# Altium PCB Slave_Relay.PcbDoc
Units mm, origin at the board's own origin, x right, y up, seen from the top; angles counter-clockwise.
Board outline 102.11 x 95 mm, 2 copper layers (Top Layer, Bottom Layer); 44 components, 37 nets, 147 pads, 7 vias.
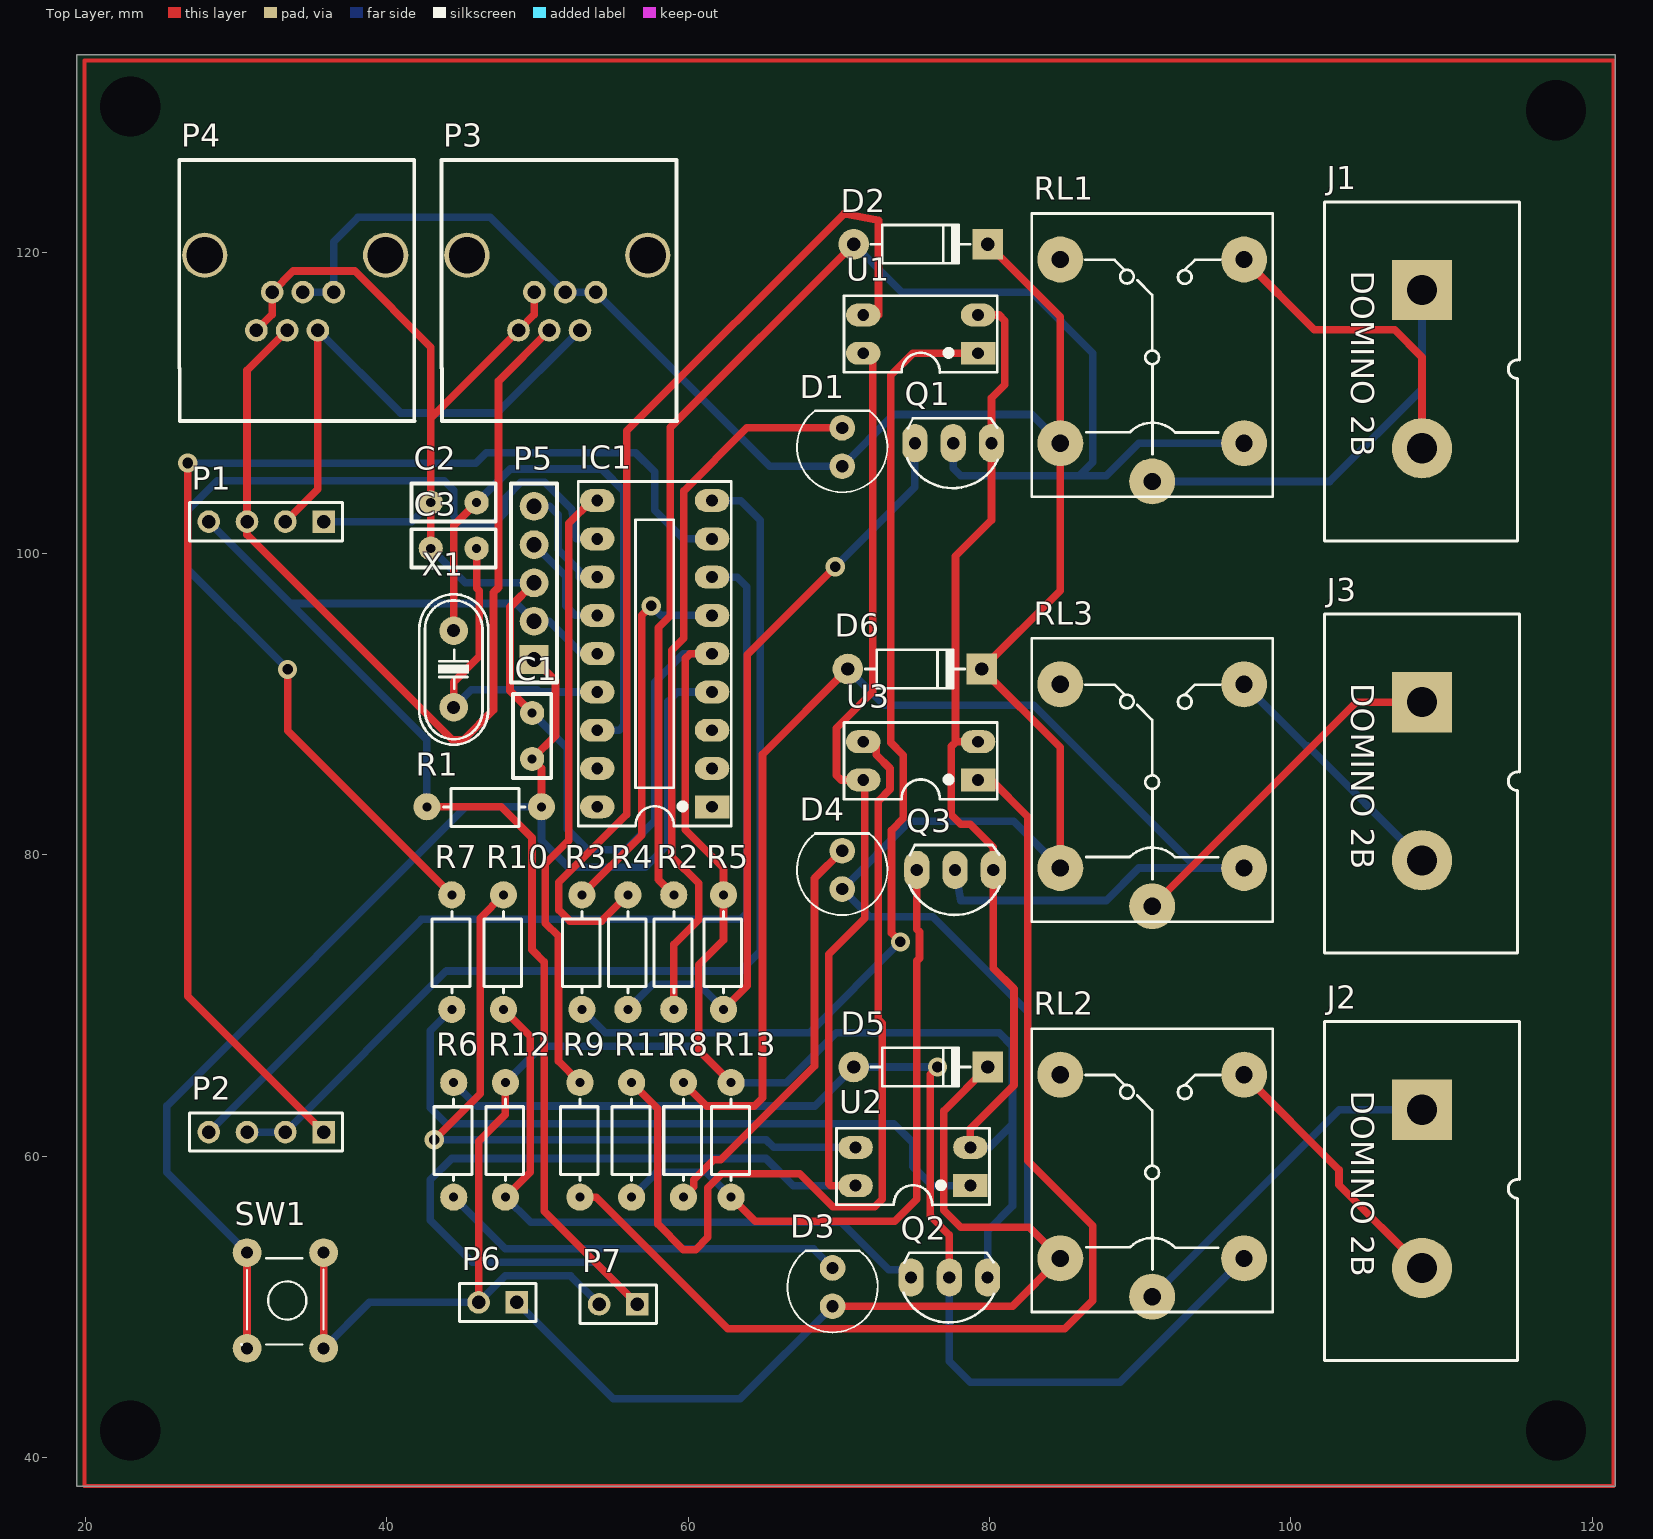
[diagram p0: Top Layer view]
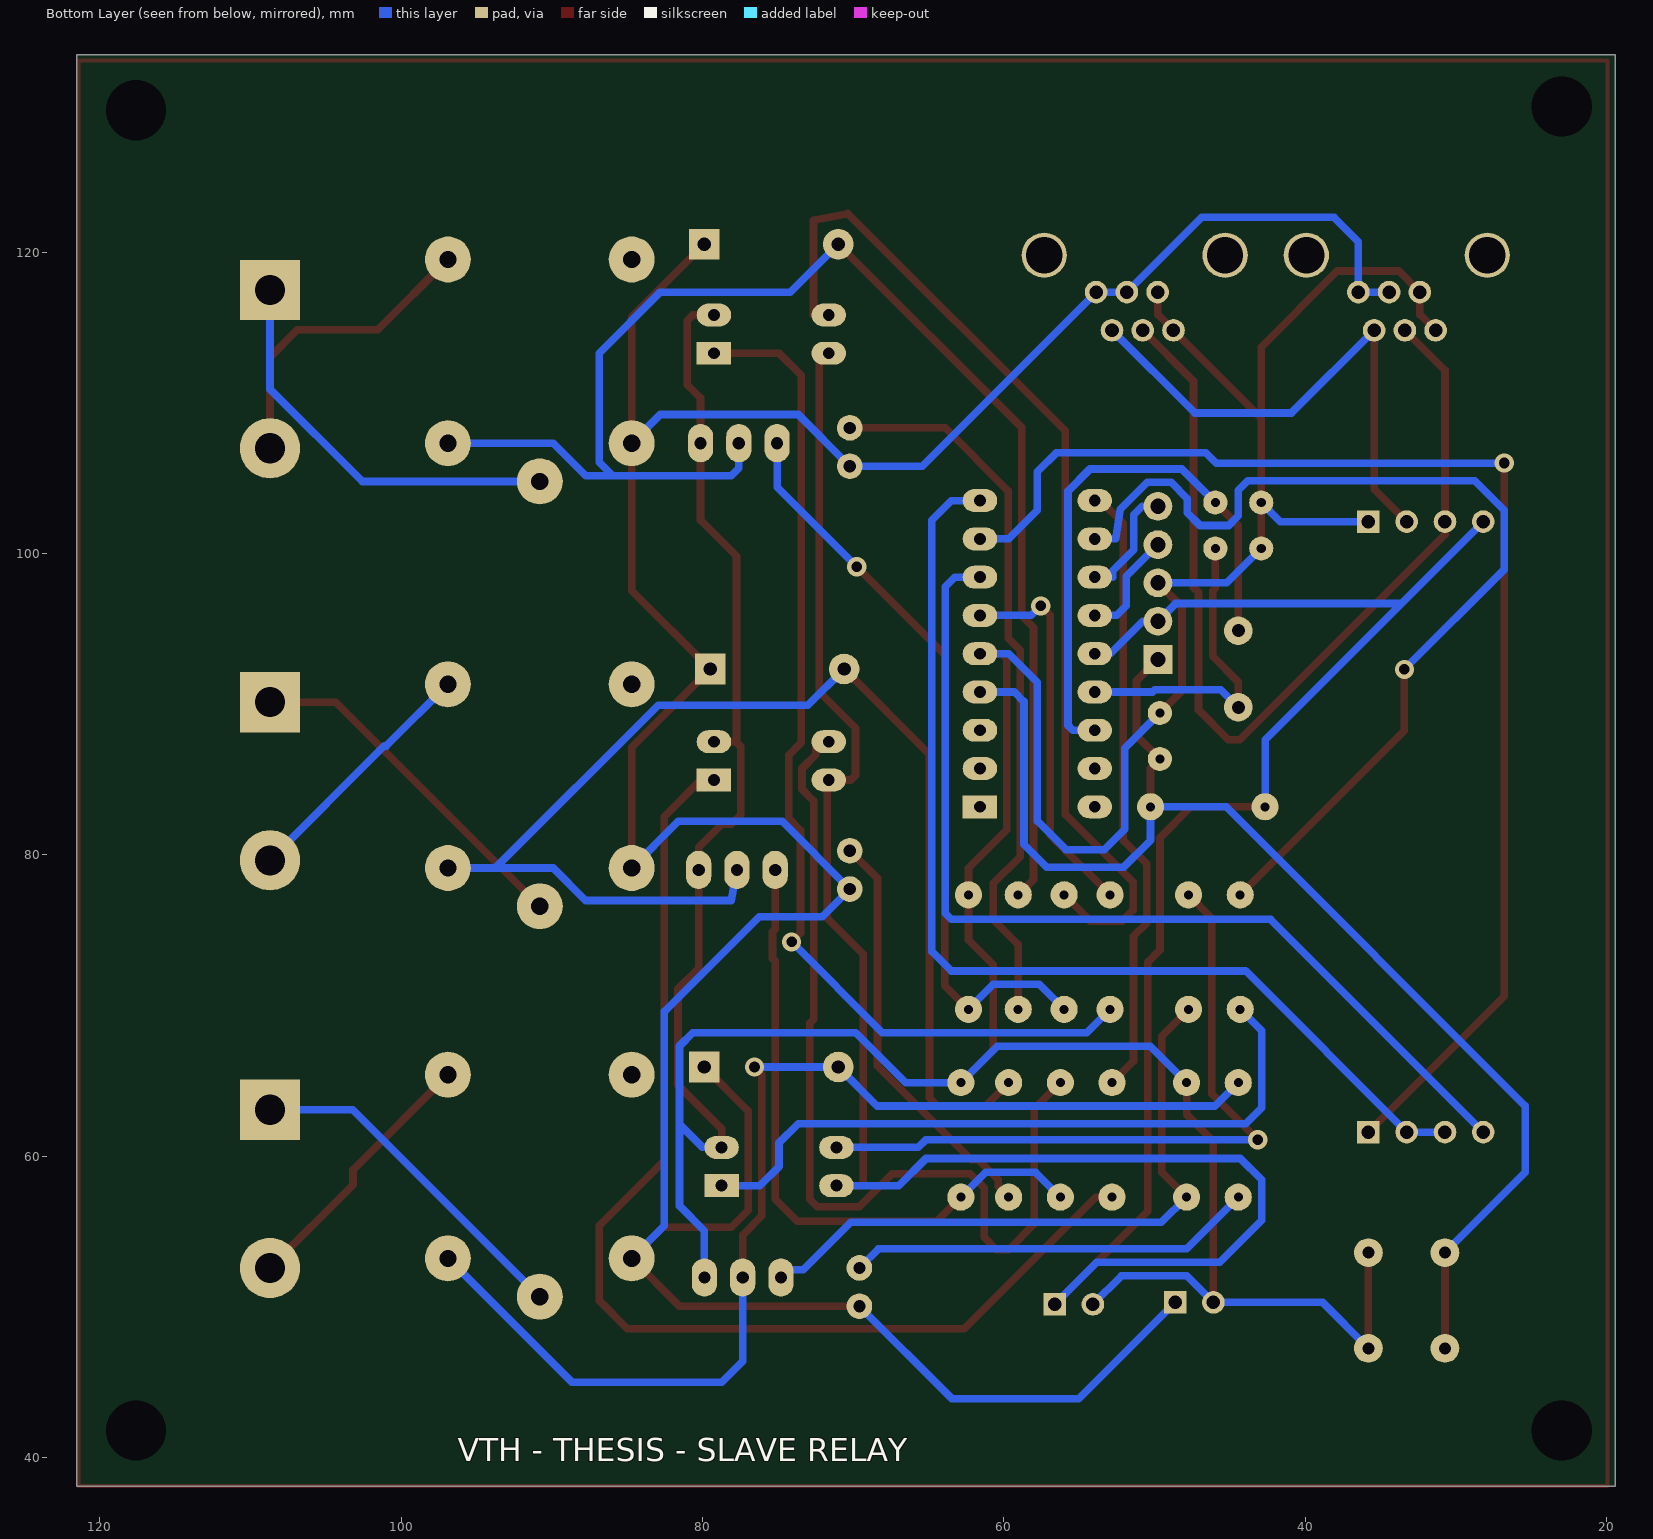
[diagram p1: Bottom Layer view, seen from below]
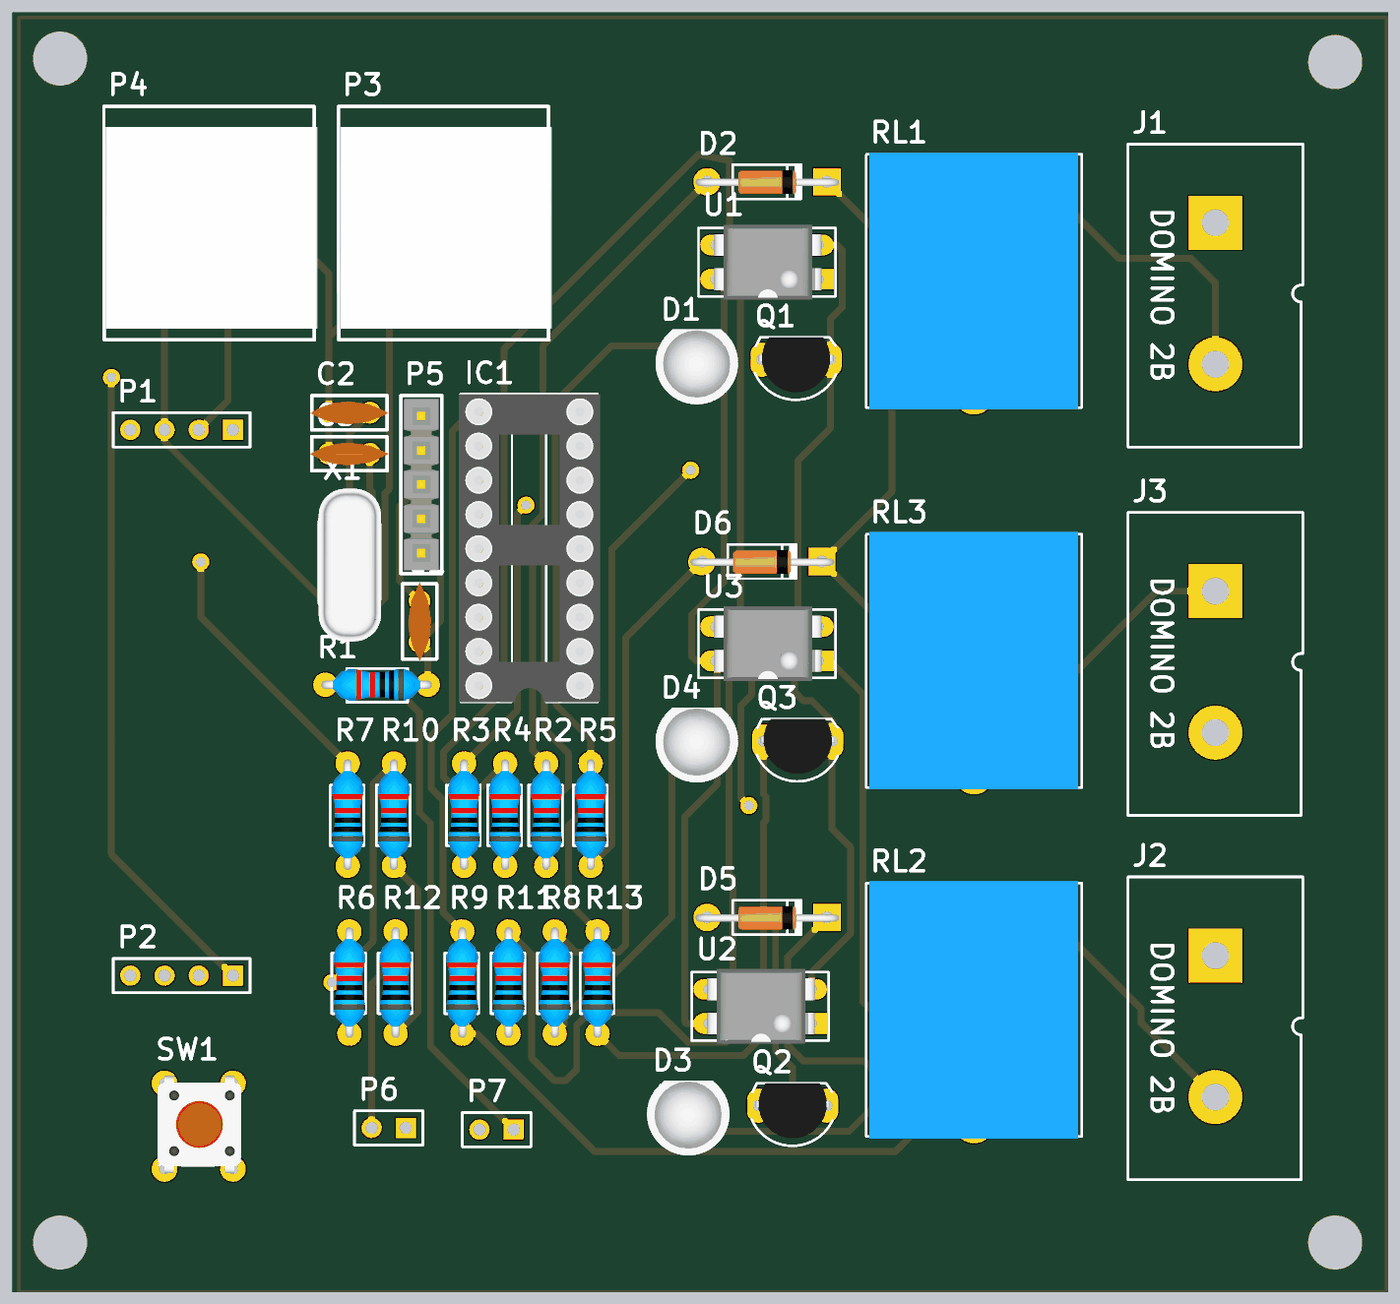
[diagram p2: 3D render of the assembled board from above, using the file's embedded part models]

## Layer stack, top to bottom
Top Solder: solder mask 0.0102, Solder Resist, Dk 3.5
Top Layer: signal copper 0.0356
Dielectric 1: dielectric 0.32, FR-4, Dk 4.8
Bottom Layer: signal copper 0.0356
Bottom Solder: solder mask 0.0102, Solder Resist, Dk 3.5

## Board outline
19.431,38.1 121.539,38.1 121.539,133.096 19.431,133.096

## Design rules (kind name [scope] priority, off if disabled: settings)
Clearance [All] p1: gap=0.381 ignorepadtopadclearanceinfootprint=FALSE
PolygonConnect [All] p1: connectstyle=Relief reliefconductorwidth=0.4 reliefentries=4 polygonreliefangle="90 Angle" airgapwidth=0.254
RoutingVias [All] p1: holewidth=0.711 width=1.27 viastyle="Through Hole" minholewidth=0.711 minwidth=1.27 maxholewidth=0.711 maxwidth=1.27
SolderMaskExpansion [All] p1: expansion=0.102
Width [All] p1: maxlimit=0.762 minlimit=0.254 preferedwidth=0.508
30 further rules are at their usual default settings.

## Components (designator, comment, footprint, x,y, rotation, side; value= is the part's Value field where it differs from the comment)
C1 "Capacitor Ceramic" "Cap Non-Pol 3mm" 49.657,87.884 r270 top value=100n
C2 "Cap Non-pol" "Cap Non-Pol 3mm" 44.45,103.378 r180 top value=22p
C3 "Cap Non-pol" "Cap Non-Pol 3mm" 44.45,100.33 r180 top value=22p
D1 "LED" "LED-0 5mm RED" 70.231,107.061 r180 top
D2 "1N4007" D1A 70.993,120.523 r180 top
D3 "LED" "LED-0 5mm RED" 69.596,51.308 r180 top
D4 "LED" "LED-0 5mm RED" 70.231,78.994 r180 top
D5 "1N4007" D1A 70.993,65.913 r180 top
D6 "1N4007" D1A 70.612,92.329 r180 top
IC1 "PIC16F628A" DIP18/W0.3 61.595,83.185 r90 top
J1 "CON.Domino2" "DOMINO 2B" 108.712,117.475 r270 top
J2 "CON.Domino2" "DOMINO 2B" 108.712,63.078 r270 top
J3 "CON.Domino2" "DOMINO 2B" 108.712,90.129 r270 top
P1 "Header 4" HDR1X4 35.814,102.108 r180 top
P2 "Header 4" HDR1X4 35.814,61.595 r180 top
P3 "Header 8" RJ11 52.832,114.808 r180 top
P4 "Header 8" RJ11 35.433,114.808 r180 top
P5 "Header 5" "Header 5" 49.784,92.964 r90 top
P6 "Header 2" HDR1X2 48.641,50.292 r180 top
P7 "Header 2" HDR1X2 56.642,50.165 r180 top
Q1 "C1815" QTO-92 77.597,107.315 r180 top
Q2 "C1815" QTO-92 77.343,51.943 r180 top
Q3 "C1815" QTO-92 77.724,78.994 r180 top
R1 "RES_SMD_0805" "RESISTOR 1/4W" 50.272,83.185 r180 top value=10k
R2 "RES_SMD_0805" "RESISTOR 1/4W" 59.055,69.743 r90 top value=2k2
R3 "RES_SMD_0805" "RESISTOR 1/4W" 52.959,69.743 r90 top value=1k
R4 "RES_SMD_0805" "RESISTOR 1/4W" 56.007,69.743 r90 top value=560
R5 "RES_SMD_0805" "RESISTOR 1/4W" 62.357,69.743 r90 top value=560
R6 "RES_SMD_0805" "RESISTOR 1/4W" 44.45,57.277 r90 top value=2k2
R7 "RES_SMD_0805" "RESISTOR 1/4W" 44.323,69.743 r90 top value=1k
R8 "RES_SMD_0805" "RESISTOR 1/4W" 59.69,57.277 r90 top value=2k2
R9 "RES_SMD_0805" "RESISTOR 1/4W" 52.832,57.277 r90 top value=1k
R10 "RES_SMD_0805" "RESISTOR 1/4W" 47.752,69.743 r90 top value=560
R11 "RES_SMD_0805" "RESISTOR 1/4W" 56.261,57.277 r90 top value=560
R12 "RES_SMD_0805" "RESISTOR 1/4W" 47.879,57.277 r90 top value=560
R13 "RES_SMD_0805" "RESISTOR 1/4W" 62.865,57.277 r90 top value=560
RL1 "Relay 10A/12V" RL_SPDT_10A 90.805,104.775 r90 top value="Relay SPDT, 10A, 12V"
RL2 "Relay 10A/12V" RL_SPDT_10A 90.805,50.673 r90 top value="Relay SPDT, 10A, 12V"
RL3 "Relay 10A/12V" RL_SPDT_10A 90.805,76.581 r90 top value="Relay SPDT, 10A, 12V"
SW1 "SW7" SW4 35.814,53.594 r270 top value="Button chip 4 pin"
U1 "TLP521-1" DIP4/W0.3 79.248,113.284 r90 top value=TLP5211
U2 "TLP521-1" DIP4/W0.3 78.74,58.039 r90 top value=TLP5211
U3 "TLP521-1" DIP4/W0.3 79.248,84.963 r90 top value=TLP5211
X1 "20Mhz" XT2 44.45,92.329 r90 top value=4Mhz

## Footprints (in the part's own frame and the unit in brackets; to place one, negate y for a bottom-side part, rotate by r counter-clockwise, add the part's x,y. Pads: shape width x height; smd on the part's side, far side on the other; paste and mask are expansions set on the pad)
"Cap Non-Pol 3mm" [mm] "Capacitor, Radial; Body 5.6 x 2.5 mm (L x W typ); Pin Spacing 3 mm (typ); Solder Pad 35mil"
  round 1.6 hole 0.6: 1(-1.524,0) 2(1.524,0)
  silkscreen extent -2.79,-1.27 2.79,1.27, body extent -2.92,-0.83 2.92,0.86, height 6.22
D1A [mil] "Diode 1A, W 100mil, L 350mil"
  round 80 hole 35: 1(0,0)
  rect 80x80 hole 35: 2(-350,0)
  silkscreen extent -305,-50 -45,50, body extent -386,-33 34,36, height 84
DIP4/W0.3 [mil] "4 PIN, W 300mil, Pin to pin 100mil"
  rect 60x90 hole 31: 1(0,0)
  oval 60x90 hole 31: 2(100,0) 3(100,300) 4(0,300)
  silkscreen extent -50,-50 150,350, body extent -59,-10 159,305, height 170
DIP18/W0.3 [mil] "18 PIN, W 300mil, Pitch 100mil"
  rect 60x90 hole 31: 1(0,0)
  oval 60x90 hole 31: 2(100,0) 3(200,0) 4(300,0) 5(400,0) 6(500,0) 7(600,0) 8(700,0) 9(800,0) 10(800,300) 11(700,300) 12(600,300) 13(500,300) 14(400,300) 15(300,300) 16(200,300) 17(100,300) 18(0,300)
  silkscreen extent -50,-50 850,350, body extent -51,-57 849,356, height 119
"DOMINO 2B" [mm]
  rect 4x4 hole 2: 1(0,0)
  round 4 hole 2: 2(10.5,0)
  silkscreen extent -5.84,-6.48 16.64,6.48
HDR1X2 [mm] "Connector; Header; 2 Position"
  rect 1.5x1.5 hole 0.9: 1(0,0)
  round 1.5 hole 0.9: 2(2.54,0)
  silkscreen extent -1.27,-1.27 3.81,1.27
HDR1X4 [mm] "Connector; Header; 4 Position"
  rect 1.5x1.5 hole 0.9: 1(0,0)
  round 1.5 hole 0.9: 2(2.54,0) 3(5.08,0) 4(7.62,0)
  silkscreen extent -1.27,-1.27 8.89,1.27
"Header 5" [mil] "Connector; Header; 5 Position; Solder Pad 35mil"
  rect 75x75 hole 40: 1(0,0)
  round 75 hole 40: 2(100,0) 3(200,0) 4(300,0) 5(400,0)
  silkscreen extent -60,-60 460,60, body extent -50,-50 450,50, height 83
"LED-0 5mm RED" [mil] "Typical LED; RED; 2 Leads; Solder Pad 35mil"
  round 67 hole 32: 1(0,50) 2(0,-50)
  silkscreen extent -118,-96 118,118, body extent -118,-96 119,117, height 345
QTO-92 [mil] "TO-92"
  oval 66x100 hole 32: 1(-100,0) 2(0,0) 3(100,0)
  silkscreen extent -117,-65 120,118, body extent -109,-66 109,95, height 245
"RESISTOR 1/4W" [mm] "P=0.25W, PITCH = 7.6 mm"
  round 1.8 hole 0.6: 1(0,0) 2(7.6,0)
  silkscreen extent 1.1,-1.2 6.5,1.3, body extent -0.31,-1.2 7.91,1.2, height 2.7
RJ11 [mm] "DIP 20, 20 PIN, W 300mil, Pin to pin 100mil"
  round 1.5 hole 0.9: 1(0,0) 2(2.04,0) 3(4.08,0) 4(-1.05,-2.53) 5(0.99,-2.53) 6(3.03,-2.53)
  round 3 hole 2.4: 7(-4.5,-4.98) 8(7.51,-4.98)
  silkscreen extent -6.43,-11.3 9.2,6.03, body extent -6.71,-9.8 9.11,5.19, height 12.87
RL_SPDT_10A [mil] "Relay SPDT, 5 pin, 10A,W 650mil, L 800mil, H 800mil"
  round 120 hole 45: 1(0,0) 2(580,240) 3(580,-240) 4(100,-240) 5(100,240)
  silkscreen extent -40,-315 700,315, body extent -46,-304 706,306, height 602
SW4 [mil] "SW button 4pin, 250 x250 mil"
  round 75 hole 31: 1(0,0) 2(250,-200) 3(250,0) 4(0,-200)
  silkscreen extent 15,-215 240,0, body extent -36,-220 276,24, height 276
XT2 [mil] "Footpin for Crystal 2 pin"
  round 75 hole 34: 1(-100,0) 2(100,0)
  silkscreen extent -198,-90 195,90, body extent -233,-93 213,90, height 138

## Part data
C1: library part CapSMD, "Capacitor", LatestRevisionDate=17-Jul-2002, LatestRevisionNote="Re-released for DXP Platform.", PackageReference=RAD-0.3, Published=8-Jun-2000, Publisher="Altium Limited"
C2 C3: "Non-polarized Capacitor", LatestRevisionDate=17-Jul-2002, LatestRevisionNote="Re-released for DXP Platform.", PackageReference=RAD-0.3, Published=8-Jun-2000, Publisher="Altium Limited"
D1 D3 D4: "Typical LED", LatestRevisionDate=08-Jul-2005, LatestRevisionNote="Mech Layer 1 removed.", PackageReference=LED-1, Published=8-Jun-2000, Publisher="Altium Limited"
D2 D5 D6: library part D1A, "Diode 1A"
J1 J2 J3: "2 pins Domino Header", ComponentLink1Description="Digikey Part link", ComponentLink2Description="Open DataSheet", ComponentLink2URL=H:\LIBRARY\LIBRARY.Datasheet\, Price=2000VND, Publisher="Hoang Nguyen"
P1 P2: "Header, 4-Pin", LatestRevisionDate=17-Jul-2002, LatestRevisionNote="Re-released for DXP Platform.", Publisher="Altium Limited"
P3 P4: "Header, 8-Pin", LatestRevisionDate=17-Jul-2002, LatestRevisionNote="Re-released for DXP Platform.", Publisher="Altium Limited"
P5: "Header, 5-Pin", LatestRevisionDate=17-Jul-2002, LatestRevisionNote="Re-released for DXP Platform.", Publisher="Altium Limited"
P6 P7: "Header, 2-Pin", LatestRevisionDate=17-Jul-2002, LatestRevisionNote="Re-released for DXP Platform.", Publisher="Altium Limited"
Q1 Q2 Q3: "NPN 600mW, ECB", =C2383
R1 R2 R3 R4 R5 R6 R7 R8 R9 R10 R11 R12 R13: "RES_0805", LatestRevisionDate=17-Jul-2002, LatestRevisionNote="Re-released for DXP Platform.", PackageReference=AXIAL-0.4, Published=8-Jun-2000, Publisher="Altium Limited"
RL1 RL2 RL3: library part "Relay 1", "Relay SPDT,10A - 12VDC 5 Pin", ="Relay SPDT, 10A, 24V"
SW1: library part SW4, "Switch button 4 pin"
U1 U2 U3: "Single Opto"
X1: library part XT2, "Crystal For all Crystal 2pin."

## Free pads (board coordinates)
  round 1.524 hole 4: 5(117.602,129.413) 6(22.987,129.667) 7(22.987,41.783) 8(117.602,41.783)

## Via types
v1: diameter 1.27, hole 0.711, Top Layer to Bottom Layer, 7 vias

## Nets (pads, with @x,y where several pads share a name; then routed paths per layer and width w, separated by ;. In a path a pad name is that pad's centre, name@x,y a point inside that pad or via, vN(x,y) a via of type N, cw(c..) or ccw(c..) an arc to the next point about the centre after c; other vN are vias at no path point)
12V: D1.1 D2.2 D3.1 D4.1 D5.2 D6.2 P3.4 P3.5 P4.4 P4.5 P6.1 RL1.5 RL2.5 RL3.5 | length 224
  Top Layer w0.508: D3.1 81.534,50.038 RL2.5 82.652,55.27 78.105,55.27 76.962,56.413 76.962,62.992 D5.2 ; D2.2 84.709,115.697 RL1.5 84.709,97.536 D6.2 84.709,87.122 RL3.5
  Bottom Layer w0.508: P4.5 P4.4 36.483,120.693 38.1,122.31 46.87,122.31 P3.5 P3.4 65.429,105.791 D1.1 73.66,109.22 82.804,109.22 RL1.5 ; P6.1 55.042,43.891 63.449,43.891 D3.1 ; RL2.5 82.55,55.372 82.55,69.596 76.251,75.895 72.06,75.895 D4.1 74.727,82.22 81.61,82.22 RL3.5
A: P1.2 P3.1 P4.1 | length 35.5
  Top Layer w0.508: P1.2 35.433,104.267 P4.1
  Bottom Layer w0.508: P4.1 40.919,109.322 47.346,109.322 P3.1
B: P1.3 P3.2 P4.2 | length 64.2
  Top Layer w0.508: P4.2 30.734,112.149 P1.3 30.734,101.244 44.348,87.63 45.11,87.63 47.092,89.611 47.092,97.409 47.422,97.739 47.422,111.438 P3.2
GND: C1.1 C2.2 C3.2 IC1.5 P1.1 P3.3 P3.6 P4.3 P4.6 P5.3 P6.2 P7.2 Q1.1 Q2.1 Q3.1 R5.2 R12.2 R13.2 SW1.1 SW1.3 U1.2 U2.2 U3.2 | length 291.1
  Top Layer w0.508: P4.3 32.403,115.858 P4.6 33.81,118.745 37.871,118.745 42.926,113.69 42.926,108.982 ; SW1.3 SW1.1 ; C3.2 C2.2 42.926,108.982 ; P6.2 46.101,60.985 47.879,62.763 R12.2 ; C1.1 48.184,90.881 48.184,96.444 P5.3 ; P3.6 49.802,115.858 P3.3 42.926,108.982 ; IC1.5 60.134,93.345 59.817,93.027 59.817,81.655 62.357,79.115 R5.2 62.357,74.346 60.706,72.695 60.706,67.036 R13.2 ; U2.2 78.74,61.798 81.636,64.694 81.636,71.095 80.264,72.466 Q3.1 80.264,80.493 78.74,82.017 78.105,82.017 77.47,82.652 77.47,87.185 77.787,87.503 ; U3.2 77.787,87.503 ; U1.2 80.645,115.824 81.026,115.443 81.026,111.201 80.137,110.312 Q1.1 80.137,102.21 77.749,99.822 77.749,87.503 77.787,87.503
  Bottom Layer w0.508: SW1.3 38.862,50.292 P6.2 47.879,52.07 52.197,52.07 P7.2 ; P1.1 41.656,102.108 C2.2 ; C3.2 45.212,98.044 P5.3 ; R12.2 50.303,67.301 60.441,67.301 R13.2 66.528,64.877 69.85,68.199 80.645,68.199 81.534,67.31 81.534,62.103 ; C1.1 51.994,87.071 51.994,81.686 53.34,80.34 55.88,80.34 57.785,82.245 57.785,91.44 59.69,93.345 IC1.5 ; U2.2 80.01,60.579 81.534,62.103 ; Q2.1 79.883,55.042 81.534,56.693 81.534,62.103
MCLR: C1.2 IC1.4 P5.1 R1.1 SW1.2 SW1.4 | length 87.3
  Top Layer w0.508: SW1.2 SW1.4 ; P5.1 51.206,91.542 51.206,87.909 C1.2 50.272,85.745 R1.1
  Bottom Layer w0.508: SW1.4 25.4,58.928 25.4,63.322 45.263,83.185 R1.1 50.272,80.97 52.07,79.172 57.15,79.172 58.674,80.696 58.674,90.17 59.309,90.805 IC1.4
NetD1_2: D1.2 R2.1 | length 48.4
  Top Layer w0.508: R2.1 59.055,74.041 60.706,75.692 60.706,78.105 58.928,79.883 58.928,93.574 59.715,94.361 59.715,104.14 63.906,108.331 D1.2
NetD2_1: D2.1 Q1.2 R2.2 RL1.4 | length 98.4
  Top Layer w0.508: R2.2 58.039,78.359 58.039,95.072 58.826,95.86 58.826,108.356 D2.1
  Bottom Layer w0.508: D2.1 74.193,117.323 82.829,117.323 86.868,113.284 86.868,106.045 85.979,105.156 ; Q1.2 77.597,105.664 78.105,105.156 85.979,105.156 ; RL1.4 89.916,107.315 87.757,105.156 85.979,105.156
NetD3_2: D3.2 R6.1 | length 27.1
  Bottom Layer w0.508: R6.1 47.879,53.848 68.326,53.848 D3.2
NetD4_2: D4.2 R8.1 | length 27.6
  Top Layer w0.508: R8.1 60.392,57.979 60.392,58.42 61.722,59.75 62.163,59.75 68.392,65.979 68.392,78.425 D4.2
NetD5_1: D5.1 Q2.2 R6.2 RL2.4 | length 77.6
  Top Layer w0.508: v1(76.556,65.913) 76.073,65.43 76.073,56.032 77.343,54.762 Q2.2
  Bottom Layer w0.508: R6.2 46.005,63.322 68.402,63.322 D5.1 v1(76.556,65.913) ; Q2.2 77.343,46.38 78.74,44.983 88.671,44.983 RL2.4
NetD6_1: D6.1 Q3.2 R8.2 RL3.4 | length 87.3
  Top Layer w0.508: R8.2 61.245,63.322 64.389,63.322 64.948,63.881 64.948,86.665 D6.1
  Bottom Layer w0.508: D6.1 73.025,89.916 82.956,89.916 93.751,79.121 ; Q3.2 78.105,76.962 87.757,76.962 89.916,79.121 93.751,79.121 ; RL3.4 93.751,79.121
NetJ1_1: J1.1 RL1.1 | length 27
  Bottom Layer w0.508: RL1.1 102.591,104.775 108.712,110.896 J1.1
NetJ1_2: J1.2 RL1.3 | length 20.5
  Top Layer w0.508: RL1.3 101.575,114.833 106.909,114.833 108.712,113.03 J1.2
NetJ2_1: J2.1 RL2.1 | length 23
  Bottom Layer w0.508: RL2.1 103.21,63.078 J2.1
NetJ2_2: J2.2 RL2.3 | length 17.7
  Top Layer w0.508: RL2.3 103.2,59.106 103.2,58.09 J2.2
NetJ3_1: J3.1 RL3.1 | length 23.5
  Top Layer w0.508: RL3.1 104.353,90.129 J3.1
NetJ3_2: J3.2 RL3.3 | length 16.7
  Bottom Layer w0.508: RL3.3 100.99,87.224 101.117,87.224 J3.2
NetQ1_3: Q1.3 R4.1 R5.1 | length 50.6
  Top Layer w0.508: R5.1 63.932,71.318 63.932,93.269 v1(69.774,99.111)
  Bottom Layer w0.508: R4.1 57.663,71.399 60.701,71.399 R5.1 ; v1(69.774,99.111) 75.057,104.394 Q1.3
NetQ2_3: Q2.3 R10.1 R12.1 | length 43.3
  Top Layer w0.508: R10.1 49.53,67.965 49.53,58.928 R12.1
  Bottom Layer w0.508: R12.1 49.555,55.601 70.18,55.601 73.33,52.451 74.803,52.451 Q2.3
NetQ3_3: Q3.3 R11.1 R13.1 | length 43.6
  Top Layer w0.508: R13.1 64.465,55.677 73.711,55.677 75.184,57.15 75.184,72.949 75.362,73.127 75.362,74.879 75.184,75.057 Q3.3
  Bottom Layer w0.508: R11.1 57.912,58.928 61.214,58.928 R13.1
NetR3_1: R3.1 U1.1 | length 69.2
  Top Layer w0.508: v1(74.092,74.219) 73.508,74.803 73.508,81.636 74.295,82.423 74.295,86.612 73.457,87.45 73.457,111.811 74.93,113.284 U1.1
  Bottom Layer w0.508: R3.1 54.503,68.199 68.072,68.199 v1(74.092,74.219)
NetR4_2: R4.2 U1.3 | length 69.3
  Top Layer w0.508: R4.2 54.254,75.59 52.172,75.59 51.424,76.338 51.424,78.17 55.931,82.677 55.931,108.128 70.358,122.555 72.644,122.098 72.644,115.824 U1.3
NetR7_1: R7.1 U2.1 | length 46
  Bottom Layer w0.508: R7.1 42.901,68.321 42.901,63.221 43.967,62.154 73.66,62.154 74.93,60.884 74.93,59.309 76.2,58.039 U2.1
NetR9_1: R9.1 U3.1 | length 76.6
  Top Layer w0.508: R9.1 53.899,57.277 62.636,48.539 84.988,48.539 86.868,50.419 86.868,55.372 82.55,59.69 82.55,82.525 80.112,84.963 U3.1
NetR10_2: R10.2 U2.3 | length 46.3
  Top Layer w0.508: v1(43.155,61.087) 46.203,64.135 46.203,75.794 R10.2
  Bottom Layer w0.508: v1(43.155,61.087) 65.176,61.087 65.684,60.579 U2.3
NetR11_2: R11.2 U3.3 | length 62.9
  Top Layer w0.508: R11.2 57.988,63.15 57.988,55.499 59.69,53.797 60.503,53.797 61.316,54.61 61.316,57.912 62.23,58.826 67.412,58.826 69.596,56.642 72.39,56.642 72.898,57.15 72.898,68.809 72.619,69.088 72.619,83.566 73.406,84.353 73.406,85.725 72.492,86.639 72.492,87.503 U3.3
PGC: IC1.12 P5.5 | length 7.7
  Bottom Layer w0.508: P5.5 50.813,103.124 51.384,102.552 51.384,100.241 52.781,98.844 52.781,98.425 IC1.12
PGD: IC1.13 P5.4 | length 7.3
  Bottom Layer w0.508: P5.4 51.892,98.476 51.892,96.52 52.527,95.885 IC1.13
RELAY1: IC1.6 R3.2 | length 25.4
  Top Layer w0.508: R3.2 56.921,81.305 56.921,95.885 v1(57.556,96.52)
  Bottom Layer w0.508: v1(57.556,96.52) 58.191,95.885 IC1.6
RELAY2: IC1.10 R9.2 | length 41.2
  Top Layer w0.508: R9.2 51.41,66.299 51.41,74.594 50.535,75.469 50.535,79.389 52.095,80.95 52.095,102.006 53.594,103.505 IC1.10
RELAY3: IC1.11 R7.2 | length 67.1
  Top Layer w0.508: v1(33.426,92.304) 33.426,88.24 R7.2
  Bottom Layer w0.508: v1(33.426,92.304) 26.797,98.933 26.797,102.87 28.753,104.826 43.815,104.826 44.45,104.191 44.45,102.489 45.085,101.854 46.99,101.854 47.828,102.692 47.828,103.632 48.908,104.712 50.482,104.712 52.273,102.921 52.591,100.965 IC1.11
RXD: IC1.7 P2.4 | length 66
  Bottom Layer w0.508: P2.4 42.316,75.717 63.5,75.717 63.906,76.124 63.906,97.79 63.271,98.425 IC1.7
SEC: IC1.9 P2.2 P2.3 | length 71.4
  Bottom Layer w0.508: P2.3 P2.2 43.967,72.288 63.5,72.288 64.795,73.584 64.795,102.21 63.5,103.505 IC1.9
TXD: IC1.8 P2.1 | length 87.1
  Top Layer w0.508: v1(26.797,105.994) 26.797,70.612 P2.1
  Bottom Layer w0.508: v1(26.797,105.994) 45.923,105.994 46.609,106.68 56.515,106.68 57.785,105.41 57.785,102.87 59.69,100.965 IC1.8
VCC: IC1.14 P1.4 P5.2 P7.1 R1.2 U1.4 U2.4 U3.4 | length 197.9
  Top Layer w0.508: R1.2 47.6,83.185 49.646,81.139 49.646,73.705 50.47,72.881 50.47,56.337 P7.1 ; U2.4 69.469,58.039 69.342,58.166 69.342,73.404 71.73,75.791 71.73,84.963 U3.4 70.168,84.963 69.85,85.281 69.85,88.392 72.263,90.805 72.263,113.284 U1.4
  Bottom Layer w0.508: P1.4 33.63,96.672 ; R1.2 42.672,87.63 33.63,96.672 ; IC1.14 52.959,93.345 50.8,95.504 P5.2 48.616,96.672 33.63,96.672 ; P7.1 53.848,52.959 45.695,52.959 42.901,55.753 42.901,58.42 44.323,59.842 65.176,59.842 66.98,58.039 U2.4
XT1: C2.1 IC1.16 X1.2 | length 37.9
  Top Layer w0.508: X1.2 44.45,101.854 C2.1
  Bottom Layer w0.508: C2.1 48.197,105.6 54.292,105.6 55.753,104.14 55.753,88.582 55.435,88.265 IC1.16
XT2: C3.1 IC1.15 X1.1 | length 21.4
  Top Layer w0.508: X1.1 44.45,91.465 46.152,93.167 46.152,97.511 45.974,97.688 C3.1
  Bottom Layer w0.508: X1.1 45.618,90.957 49.987,90.957 50.14,90.805 IC1.15
pads on no net: IC1.1 IC1.2 IC1.3 IC1.17 IC1.18 P3.7 P3.8 P4.7 P4.8 RL1.2 RL2.2 RL3.2
copper on no net: | length 392.2
  Top Layer w0.254: 19.939,38.1 19.939,68.802 19.939,106.331 19.939,132.715 121.412,132.715 121.412,38.1 19.939,38.1

## Silkscreen, mask and mechanical layers (free items; w line width, h text height)
Bottom Overlay:
  text "VTH - THESIS - SLAVE RELAY" at 96.266,39.751 h1.52

## Text inside footprints (layer, text, board x,y; h text height)
J1: Top Overlay "DOMINO 2B" at 104.013,118.745 h1.52 r270
J2: Top Overlay "DOMINO 2B" at 104.013,64.348 h1.52 r270
J3: Top Overlay "DOMINO 2B" at 104.013,91.399 h1.52 r270